# Altium PCB UF_Servo.PcbDoc (part 6 of 12)
Units mm, origin at the board's own origin, x right, y up, seen from the top; angles counter-clockwise.
Board outline 222.63 x 100.1 mm, 6 copper layers (L1, L2, L3, L4, L5, L6), stack 1.609 mm thick; 1138 components, 775 nets, 3720 pads, 1641 vias.
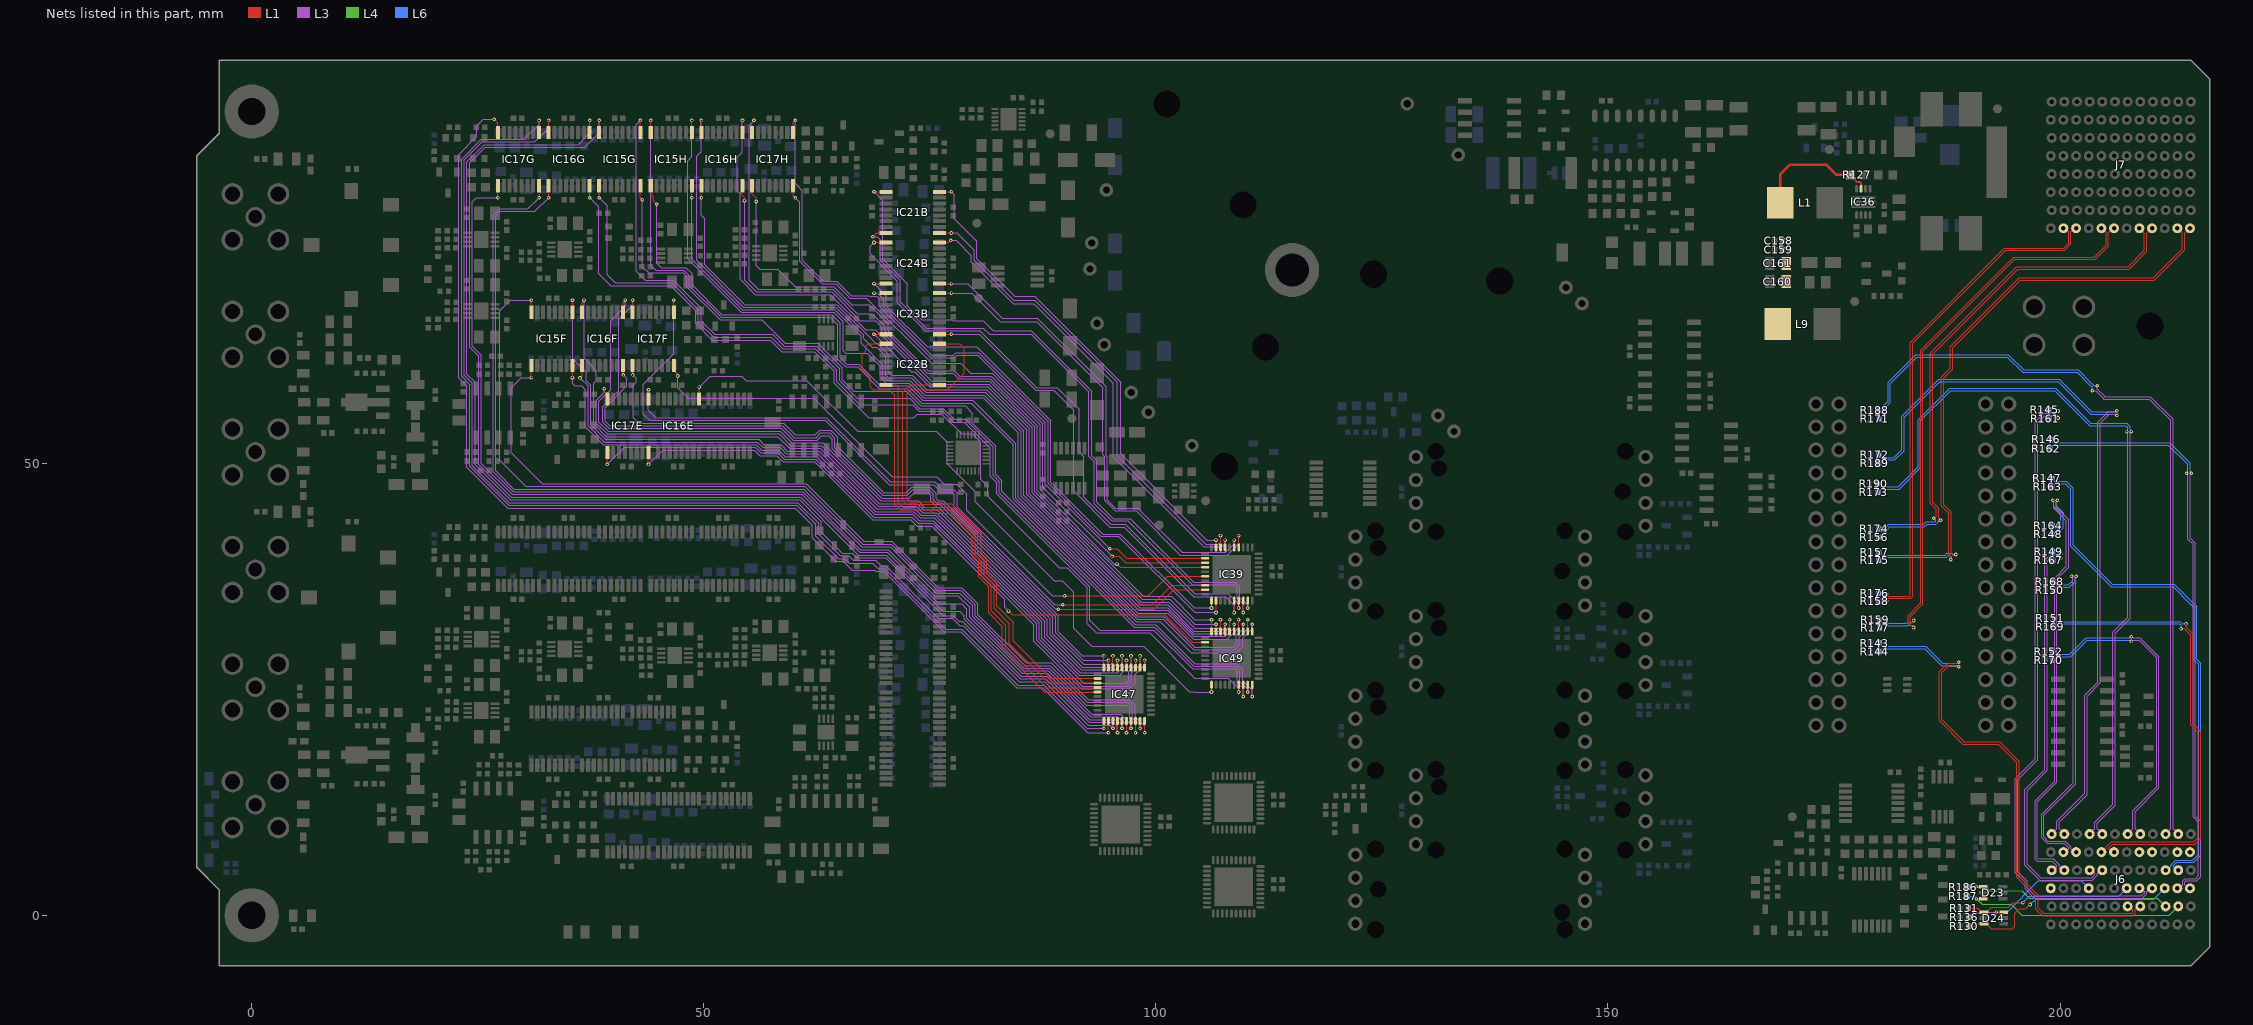
[diagram p8: the nets of this part, all layers, seen from the top]

## Part data (continued)
R22A R22B R154: library part R0402_200R_1%_0.0625W_100PPM, "Resistor - 1%", Case=0402, Manufacturer=GENERIC, Manufacturer1 ComponentHeight=0.4mm, Manufacturer1 Example="YAGEO PHYCOMP", Manufacturer1 Part Number=232270672001L, Power=0.0625W, Tolerance=±1%, Author="CERN DEM JLC", Component Type=Standard, HelpURL=\\cern.ch\dfs\Applications\Altium\Datasheets\R0402_Phycomp_RC0402.pdf, Manufacturer Part Number=R0402_200R_1%_0.0625W_100PPM, Mounted=Yes, Part Description="General Purpose Thick Film Chip Resistor", Part Number=R0402_200R_1%_0.0625W_100PPM, Pin Count=2, PressFit=No, Sense=No, SMD=Yes, Socket=No, Status="Not Recommended", TC=±100ppm/°C
  R22A R22B: CreateDate=12/3/2007, LatestRevisionDate=10/17/2012
  R154: CreateDate=03.12.2007, LatestRevisionDate=17.10.2012
R24A R24B: library part R0402_160R_1%_0.0625W_100PPM, "Resistor - 1%", Case=0402, Manufacturer=GENERIC, Manufacturer1 ComponentHeight=0.4mm, Manufacturer1 Example="YAGEO PHYCOMP", Manufacturer1 Part Number=232270671601L, Power=0.0625W, Tolerance=±1%, Author="CERN DEM JLC", Component Type=Standard, CreateDate=12/3/2007, HelpURL=\\cern.ch\dfs\Applications\Altium\Datasheets\R0402_Phycomp_RC0402.pdf, LatestRevisionDate=10/17/2012, Manufacturer Part Number=R0402_160R_1%_0.0625W_100PPM, Mounted=Yes, Part Description="General Purpose Thick Film Chip Resistor", Part Number=R0402_160R_1%_0.0625W_100PPM, Pin Count=2, PressFit=No, Sense=No, SMD=Yes, Socket=No, Status="Not Recommended", TC=±100ppm/°C
R33A R33B R40A R40B: library part R0402_68R_1%_0.0625W_100PPM, "Resistor - 1%", Case=0402, Manufacturer=GENERIC, Manufacturer1 ComponentHeight=0.4mm, Manufacturer1 Example="YAGEO PHYCOMP", Manufacturer1 Part Number=232270676809L, Power=0.0625W, Tolerance=±1%, Author="CERN DEM JLC", Component Type=Standard, CreateDate=12/3/2007, HelpURL=\\cern.ch\dfs\Applications\Altium\Datasheets\R0402_Phycomp_RC0402.pdf, LatestRevisionDate=10/17/2012, Manufacturer Part Number=R0402_68R_1%_0.0625W_100PPM, Mounted=Yes, Part Description="General Purpose Thick Film Chip Resistor", Part Number=R0402_68R_1%_0.0625W_100PPM, Pin Count=2, PressFit=No, Sense=No, SMD=Yes, Socket=No, Status="Not Recommended", TC=±100ppm/°C
R35A R35B: library part R0805_22R_1%_0.125W_100PPM, "Resistor - 1%", Case=0805, Manufacturer=GENERIC, Manufacturer1 ComponentHeight=0.6mm, Manufacturer1 Example="NIC COMPONENT", Manufacturer1 Part Number=NRC10F22R0TRF, Power=0.125W, Tolerance=±1%, Author="CERN DEM JLC", Component Type=Standard, CreateDate=12/3/2007, HelpURL=\\cern.ch\dfs\Applications\Altium\Datasheets\R0805_NIC_NRC.pdf, LatestRevisionDate=3/13/2008, Manufacturer Part Number=R0805_22R_1%_0.125W_100PPM, Mounted=Yes, Part Description="General Purpose Thick Film Chip Resistor", Part Number=R0805_22R_1%_0.125W_100PPM, Pin Count=2, PressFit=No, Sense=No, SMD=Yes, Socket=No, Status=Preferred, TC=±100ppm/°C
R36A R36B R68A R68B: library part R0402_820R_1%_0.0625W_100PPM, "Resistor - 1%", Case=0402, Manufacturer=GENERIC, Manufacturer1 ComponentHeight=0.4mm, Manufacturer1 Example="YAGEO PHYCOMP", Manufacturer1 Part Number=232270678201L, Power=0.0625W, Tolerance=±1%, Author="CERN DEM JLC", Component Type=Standard, CreateDate=12/3/2007, HelpURL=\\cern.ch\dfs\Applications\Altium\Datasheets\R0402_Phycomp_RC0402.pdf, LatestRevisionDate=10/17/2012, Manufacturer Part Number=R0402_820R_1%_0.0625W_100PPM, Mounted=Yes, Part Description="General Purpose Thick Film Chip Resistor", Part Number=R0402_820R_1%_0.0625W_100PPM, Pin Count=2, PressFit=No, Sense=No, SMD=Yes, Socket=No, Status="Not Recommended", TC=±100ppm/°C
R37 R134 R155 R160 R165 R166 R178 R180 R184 R185: library part R0603_10K_1%_0.1W_100PPM, "Resistor - 1%", Case=0603, Manufacturer=GENERIC, Manufacturer1 ComponentHeight=0.55mm, Manufacturer1 Example="NIC COMPONENT", Manufacturer1 Part Number=NRC06F1002TRF, Power=0.1W, Tolerance=±1%, Author="CERN DEM JLC", Component Type=Standard, CreateDate=03.12.2007, HelpURL=\\cern.ch\dfs\Applications\Altium\Datasheets\R0603_NIC_NRC.pdf, LatestRevisionDate=13.03.2008, Manufacturer Part Number=R0603_10K_1%_0.1W_100PPM, Mounted=Yes, Part Description="General Purpose Thick Film Chip Resistor", Part Number=R0603_10K_1%_0.1W_100PPM, Pin Count=2, PressFit=No, Sense=No, SMD=Yes, Socket=No, Status=Preferred, TC=±100ppm/°C
R47A R47B: library part R0402_130R_1%_0.0625W_100PPM, "Resistor - 1%", Case=0402, Manufacturer=GENERIC, Manufacturer1 ComponentHeight=0.4mm, Manufacturer1 Example="YAGEO PHYCOMP", Manufacturer1 Part Number=232270671301L, Power=0.0625W, Tolerance=±1%, Author="CERN DEM JLC", Component Type=Standard, CreateDate=12/3/2007, HelpURL=\\cern.ch\dfs\Applications\Altium\Datasheets\R0402_Phycomp_RC0402.pdf, LatestRevisionDate=10/17/2012, Manufacturer Part Number=R0402_130R_1%_0.0625W_100PPM, Mounted=Yes, Part Description="General Purpose Thick Film Chip Resistor", Part Number=R0402_130R_1%_0.0625W_100PPM, Pin Count=2, PressFit=No, Sense=No, SMD=Yes, Socket=No, Status="Not Recommended", TC=±100ppm/°C
R55A R55B: library part R0402_20R_1%_0.0625W_100PPM, "Resistor - 1%", Case=0402, Manufacturer=GENERIC, Manufacturer1 ComponentHeight=0.4mm, Manufacturer1 Example="YAGEO PHYCOMP", Manufacturer1 Part Number=232270672009L, Power=0.0625W, Tolerance=±1%, Author="CERN DEM JLC", Component Type=Standard, CreateDate=12/3/2007, HelpURL=\\cern.ch\dfs\Applications\Altium\Datasheets\R0402_Phycomp_RC0402.pdf, LatestRevisionDate=10/17/2012, Manufacturer Part Number=R0402_20R_1%_0.0625W_100PPM, Mounted=Yes, Part Description="General Purpose Thick Film Chip Resistor", Part Number=R0402_20R_1%_0.0625W_100PPM, Pin Count=2, PressFit=No, Sense=No, SMD=Yes, Socket=No, Status="Not Recommended", TC=±100ppm/°C
R58A R58B R75 R76 R78 R140 R191 R193 R195 R196: library part R0402_10K_1%_0.0625W_100PPM, "Resistor - 1%", Case=0402, Manufacturer=GENERIC, Manufacturer1 ComponentHeight=0.4mm, Manufacturer1 Example="YAGEO PHYCOMP", Manufacturer1 Part Number=232270671003L, Power=0.0625W, Tolerance=±1%, Author="CERN DEM JLC", Component Type=Standard, CreateDate=12/3/2007, HelpURL=\\cern.ch\dfs\Applications\Altium\Datasheets\R0402_Phycomp_RC0402.pdf, LatestRevisionDate=10/17/2012, Manufacturer Part Number=R0402_10K_1%_0.0625W_100PPM, Mounted=Yes, Part Description="General Purpose Thick Film Chip Resistor", Part Number=R0402_10K_1%_0.0625W_100PPM, Pin Count=2, PressFit=No, Sense=No, SMD=Yes, Socket=No, Status="Not Recommended", TC=±100ppm/°C
R62A R62B R62C R62D R62E R62F R62G R62H R65A R65B R102 R198 R199 R205 R206 R208A R208B R208C R208D R208E R208F R208G R208H R210A R210B: library part R0402_100K_1%_0.0625W_100PPM, "Resistor - 1%", Case=0402, Manufacturer=GENERIC, Manufacturer1 ComponentHeight=0.4mm, Manufacturer1 Example="YAGEO PHYCOMP", Manufacturer1 Part Number=232270671004L, Power=0.0625W, Tolerance=±1%, Author="CERN DEM JLC", Component Type=Standard, CreateDate=12/3/2007, HelpURL=\\cern.ch\dfs\Applications\Altium\Datasheets\R0402_Phycomp_RC0402.pdf, LatestRevisionDate=10/17/2012, Manufacturer Part Number=R0402_100K_1%_0.0625W_100PPM, Mounted=Yes, Part Description="General Purpose Thick Film Chip Resistor", Part Number=R0402_100K_1%_0.0625W_100PPM, Pin Count=2, PressFit=No, Sense=No, SMD=Yes, Socket=No, Status="Not Recommended", TC=±100ppm/°C
R70A R70B R71A R71B R73A R73B R74A R74B R83 R86 R92 R94 R108 R119 R121 R141: library part R0402_1K_1%_0.0625W_100PPM, "Resistor - 1%", Case=0402, Manufacturer=GENERIC, Manufacturer1 ComponentHeight=0.4mm, Manufacturer1 Example="YAGEO PHYCOMP", Manufacturer1 Part Number=232270671002L, Power=0.0625W, Tolerance=±1%, Author="CERN DEM JLC", Component Type=Standard, CreateDate=12/3/2007, HelpURL=\\cern.ch\dfs\Applications\Altium\Datasheets\R0402_Phycomp_RC0402.pdf, LatestRevisionDate=10/17/2012, Manufacturer Part Number=R0402_1K_1%_0.0625W_100PPM, Mounted=Yes, Part Description="General Purpose Thick Film Chip Resistor", Part Number=R0402_1K_1%_0.0625W_100PPM, Pin Count=2, PressFit=No, Sense=No, SMD=Yes, Socket=No, Status="Not Recommended", TC=±100ppm/°C
R77 R135 R137 R143 R144 R145 R146 R147 R148 R149 R150 R151 R152 R156 R157 R158 R159 R161 R162 R163 R164 R167 R168 R169 R170 R171 R172 R173 R174 R175 R176 R177 R181 R182 R186 R187 R188 R189 R190 R225A R225B R257 R260 R261 R262: library part R0402_0R_JUMPER, "Resistor", Case=0402, Manufacturer=GENERIC, Manufacturer1 ComponentHeight=0.4mm, Manufacturer1 Example="YAGEO PHYCOMP", Manufacturer1 Part Number=232270591001L, Author="CERN DEM JLC", Component Type=Standard, HelpURL=\\cern.ch\dfs\Applications\Altium\Datasheets\R0402_Phycomp_RC0402.pdf, Manufacturer Part Number=R0402_0R_JUMPER, Mounted=Yes, Part Description="1A (0.05R Max DC Resistance) Zero Ohm Jumper", Part Number=R0402_0R_JUMPER, Pin Count=2, Sense=No, SMD=Yes, Socket=No
  R77 R225A R225B: CreateDate=12/3/2007, LatestRevisionDate=10/17/2012, PressFit=No, Status="Not Recommended"
  R135 R137: CreateDate=03.12.2007, LatestRevisionDate=17.10.2012, Status="Not recommended"
  R143 R144 R145 R146 R147 R148 R149 R150 R151 R152 R156 R157 R158 R159 R161 R162 R163 R164 R167 R168 R169 R170 R171 R172 R173 R174 R175 R176 R177 R181 R182 R186 R187 R188 R189 R190 R257 R260 R261 R262: CreateDate=03.12.2007, LatestRevisionDate=17.10.2012, PressFit=No, Status="Not Recommended"
R79 R80 R87 R88 R95 R96: library part R0402_390R_1%_0.0625W_100PPM, "Resistor - 1%", Case=0402, Manufacturer=GENERIC, Manufacturer1 ComponentHeight=0.4mm, Manufacturer1 Example="YAGEO PHYCOMP", Manufacturer1 Part Number=232270673901L, Power=0.0625W, Tolerance=±1%, Author="CERN DEM JLC", Component Type=Standard, CreateDate=12/3/2007, HelpURL=\\cern.ch\dfs\Applications\Altium\Datasheets\R0402_Phycomp_RC0402.pdf, LatestRevisionDate=10/17/2012, Manufacturer Part Number=R0402_390R_1%_0.0625W_100PPM, Mounted=Yes, Part Description="General Purpose Thick Film Chip Resistor", Part Number=R0402_390R_1%_0.0625W_100PPM, Pin Count=2, PressFit=No, Sense=No, SMD=Yes, Socket=No, Status="Not Recommended", TC=±100ppm/°C
R81 R82 R89 R90 R97 R98 R222A R222B R223A R223B: library part R0402_47R_1%_0.0625W_100PPM, "Resistor - 1%", Case=0402, Manufacturer=GENERIC, Manufacturer1 ComponentHeight=0.4mm, Manufacturer1 Example="YAGEO PHYCOMP", Manufacturer1 Part Number=232270674709L, Power=0.0625W, Tolerance=±1%, Author="CERN DEM JLC", Component Type=Standard, CreateDate=12/3/2007, HelpURL=\\cern.ch\dfs\Applications\Altium\Datasheets\R0402_Phycomp_RC0402.pdf, LatestRevisionDate=10/17/2012, Manufacturer Part Number=R0402_47R_1%_0.0625W_100PPM, Mounted=Yes, Part Description="General Purpose Thick Film Chip Resistor", Part Number=R0402_47R_1%_0.0625W_100PPM, Pin Count=2, PressFit=No, Sense=No, SMD=Yes, Socket=No, Status="Not Recommended", TC=±100ppm/°C
R84 R85 R91 R93 R99 R120: library part R0402_150R_1%_0.0625W_100PPM, "Resistor - 1%", Case=0402, Manufacturer=GENERIC, Manufacturer1 ComponentHeight=0.4mm, Manufacturer1 Example="YAGEO PHYCOMP", Manufacturer1 Part Number=232270671501L, Power=0.0625W, Tolerance=±1%, Author="CERN DEM JLC", Component Type=Standard, CreateDate=12/3/2007, HelpURL=\\cern.ch\dfs\Applications\Altium\Datasheets\R0402_Phycomp_RC0402.pdf, LatestRevisionDate=10/17/2012, Manufacturer Part Number=R0402_150R_1%_0.0625W_100PPM, Mounted=Yes, Part Description="General Purpose Thick Film Chip Resistor", Part Number=R0402_150R_1%_0.0625W_100PPM, Pin Count=2, PressFit=No, Sense=No, SMD=Yes, Socket=No, Status="Not Recommended", TC=±100ppm/°C
R100 R101 R103 R104 R107 R109 R110 R111 R113 R117: library part R0603_47R_1%_0.1W_100PPM, "Resistor - 1%", Case=0603, Manufacturer=GENERIC, Manufacturer1 ComponentHeight=0.55mm, Manufacturer1 Example="NIC COMPONENT", Manufacturer1 Part Number=NRC06F47R0TRF, Power=0.1W, Tolerance=±1%, Author="CERN DEM JLC", Component Type=Standard, CreateDate=12/3/2007, HelpURL=\\cern.ch\dfs\Applications\Altium\Datasheets\R0603_NIC_NRC.pdf, LatestRevisionDate=3/13/2008, Manufacturer Part Number=R0603_47R_1%_0.1W_100PPM, Mounted=Yes, Part Description="General Purpose Thick Film Chip Resistor", Part Number=R0603_47R_1%_0.1W_100PPM, Pin Count=2, PressFit=No, Sense=No, SMD=Yes, Socket=No, Status=Preferred, TC=±100ppm/°C
R105: library part R2512_0R5_1%_1.5W_100PPM, "Resistor - 1%", Case=2512, Manufacturer=GENERIC, Manufacturer1 ComponentHeight=0.8mm, Manufacturer1 Example=WELWYN, Manufacturer1 Part Number=LR2512-R50FW, Power=1.5W, Tolerance=±1%, Author="CERN DEM JLC", Component Type=Standard, CreateDate=8/23/2010, HelpURL=\\cern.ch\dfs\Applications\Altium\Datasheets\R2512_WELWYN_LR.pdf, LatestRevisionDate=8/23/2010, Manufacturer Part Number=R2512_0R5_1%_1.5W_100PPM, Mounted=Yes, Part Description="Thick Film Chip Resistor", Part Number=R2512_0R5_1%_1.5W_100PPM, Pin Count=2, PressFit=No, Sense=No, SMD=Yes, Socket=No, Status=None, TC=±100ppm/°C
R106 R179 R183: library part R0603_2K7_1%_0.1W_100PPM, "Resistor - 1%", Case=0603, Manufacturer=GENERIC, Manufacturer1 ComponentHeight=0.55mm, Manufacturer1 Example="YAGEO PHYCOMP", Manufacturer1 Part Number=RC0603FR-072K7L, Power=0.1W, Tolerance=±1%, Author="CERN DEM JLC", Component Type=Standard, HelpURL=\\cern.ch\dfs\Applications\Altium\Datasheets\R0603_PHYCOMP_RC0603.pdf, Manufacturer Part Number=R0603_2K7_1%_0.1W_100PPM, Mounted=Yes, Part Description="General Purpose Thick Film Chip Resistor", Part Number=R0603_2K7_1%_0.1W_100PPM, Pin Count=2, PressFit=No, Sense=No, SMD=Yes, Socket=No, Status=Preferred, TC=±100ppm/°C
  R106: CreateDate=5/2/2011, LatestRevisionDate=5/2/2011
  R179 R183: CreateDate=02.05.2011, LatestRevisionDate=02.05.2011
R112: library part R0603_1M_1%_0.1W_100PPM, "Resistor - 1%", Case=0603, Manufacturer=GENERIC, Manufacturer1 ComponentHeight=0.55mm, Manufacturer1 Example="NIC COMPONENT", Manufacturer1 Part Number=NRC06F1004TRF, Power=0.1W, Tolerance=±1%, Author="CERN DEM JLC", Component Type=Standard, CreateDate=12/3/2007, HelpURL=\\cern.ch\dfs\Applications\Altium\Datasheets\R0603_NIC_NRC.pdf, LatestRevisionDate=3/13/2008, Manufacturer Part Number=R0603_1M_1%_0.1W_100PPM, Mounted=Yes, Part Description="General Purpose Thick Film Chip Resistor", Part Number=R0603_1M_1%_0.1W_100PPM, Pin Count=2, PressFit=No, Sense=No, SMD=Yes, Socket=No, Status=Preferred, TC=±100ppm/°C
R114: library part R0603_806R_0.1%_0.063W_10PPM, "Resistor - 0.1%", Case=0603, Manufacturer=GENERIC, Manufacturer1 ComponentHeight=0.5mm, Manufacturer1 Example="TYCO HOLSWORTHY", Manufacturer1 Part Number=RN73C1J806RBTDF, Power=0.063W, Tolerance=±0.1%, Author="CERN DEM JLC", Component Type=Standard, CreateDate=12/3/2007, HelpURL=\\cern.ch\dfs\Applications\Altium\Datasheets\R0603_Tyco_RN73.pdf, LatestRevisionDate=3/13/2008, Manufacturer Part Number=R0603_806R_0.1%_0.063W_10PPM, Mounted=Yes, Part Description="Thin Film Chip Resistor", Part Number=R0603_806R_0.1%_0.063W_10PPM, Pin Count=2, PressFit=No, Sense=No, SMD=Yes, Socket=No, Status="Not Recommended", TC=±10ppm
R115: library part R0603_1K6_1%_0.1W_100PPM, "Resistor - 1%", Case=0603, Manufacturer=GENERIC, Manufacturer1 ComponentHeight=0.55mm, Manufacturer1 Example="NIC COMPONENT", Manufacturer1 Part Number=NRC06F1601TRF, Power=0.1W, Tolerance=±1%, Author="CERN DEM JLC", Component Type=Standard, CreateDate=12/3/2007, HelpURL=\\cern.ch\dfs\Applications\Altium\Datasheets\R0603_NIC_NRC.pdf, LatestRevisionDate=3/13/2008, Manufacturer Part Number=R0603_1K6_1%_0.1W_100PPM, Mounted=Yes, Part Description="General Purpose Thick Film Chip Resistor", Part Number=R0603_1K6_1%_0.1W_100PPM, Pin Count=2, PressFit=No, Sense=No, SMD=Yes, Socket=No, Status=Preferred, TC=±100ppm/°C
R116 R122 R123 R124 R125 R211: library part R0402_39K_1%_0.0625W_100PPM, "Resistor - 1%", Case=0402, Manufacturer=GENERIC, Manufacturer1 ComponentHeight=0.4mm, Manufacturer1 Example="YAGEO PHYCOMP", Manufacturer1 Part Number=232270673903, Power=0.0625W, Tolerance=±1%, Author="CERN DEM JLC", Component Type=Standard, CreateDate=12/3/2007, HelpURL=\\cern.ch\dfs\Applications\Altium\Datasheets\R0402_Phycomp_RC0402.pdf, LatestRevisionDate=10/17/2012, Manufacturer Part Number=R0402_39K_1%_0.0625W_100PPM, Mounted=Yes, Part Description="General Purpose Thick Film Chip Resistor", Part Number=R0402_39K_1%_0.0625W_100PPM, Pin Count=2, PressFit=No, Sense=No, SMD=Yes, Socket=No, Status="Not Recommended", TC=±100ppm/°C
R126: library part R0603_3K09_0.1%_0.063W_10PPM, "Resistor - 0.1%", Case=0603, Manufacturer=GENERIC, Manufacturer1 ComponentHeight=0.5mm, Manufacturer1 Example="TYCO HOLSWORTHY", Manufacturer1 Part Number=RN73C1J3K09BTDF, Power=0.063W, Tolerance=±0.1%, Author="CERN DEM JLC", Component Type=Standard, CreateDate=12/3/2007, HelpURL=\\cern.ch\dfs\Applications\Altium\Datasheets\R0603_Tyco_RN73.pdf, LatestRevisionDate=3/13/2008, Manufacturer Part Number=R0603_3K09_0.1%_0.063W_10PPM, Mounted=Yes, Part Description="Thin Film Chip Resistor", Part Number=R0603_3K09_0.1%_0.063W_10PPM, Pin Count=2, PressFit=No, Sense=No, SMD=Yes, Socket=No, Status="Not Recommended", TC=±10ppm
R127: library part R0603_560K_1%_0.1W_100PPM, "Resistor - 1%", Case=0603, Manufacturer=GENERIC, Manufacturer1 ComponentHeight=0.55mm, Manufacturer1 Example="NIC COMPONENT", Manufacturer1 Part Number=NRC06F5603TRF, Power=0.1W, Tolerance=±1%, Author="CERN DEM JLC", Component Type=Standard, CreateDate=03.12.2007, HelpURL=\\cern.ch\dfs\Applications\Altium\Datasheets\R0603_NIC_NRC.pdf, LatestRevisionDate=13.03.2008, Manufacturer Part Number=R0603_560K_1%_0.1W_100PPM, Mounted=Yes, Part Description="General Purpose Thick Film Chip Resistor", Part Number=R0603_560K_1%_0.1W_100PPM, Pin Count=2, PressFit=No, Sense=No, SMD=Yes, Socket=No, Status=Preferred, TC=±100ppm/°C
R128: library part R0603_49K9_1%_0.1W_100PPM, "Resistor - 1%", Case=0603, Manufacturer=GENERIC, Manufacturer1 ComponentHeight=0.55mm, Manufacturer1 Example=VISHAY, Manufacturer1 Part Number=CRCW060349K9FKEA, Power=0.1W, Tolerance=±1%, Author="CERN DEM JLC", Component Type=Standard, CreateDate=16.11.2017, HelpURL="\\cern.ch\dfs\Applications\Altium\Datasheets\R0603_VISHAY_CRCW e3.pdf", LatestRevisionDate=16.11.2017, Manufacturer Part Number=R0603_49K9_1%_0.1W_100PPM, Mounted=Yes, Part Description="General Purpose Thick Film Chip Resistor", Part Number=R0603_49K9_1%_0.1W_100PPM, Pin Count=2, PressFit=No, Sense=No, SMD=Yes, Socket=No, Status=Preferred, TC=±100ppm/°C
R129: library part R0603_150K_1%_0.1W_100PPM, "Resistor - 1%", Case=0603, Manufacturer=GENERIC, Manufacturer1 ComponentHeight=0.55mm, Manufacturer1 Example="NIC COMPONENT", Manufacturer1 Part Number=NRC06F1503TRF, Power=0.1W, Tolerance=±1%, Author="CERN DEM JLC", Component Type=Standard, CreateDate=03.12.2007, HelpURL=\\cern.ch\dfs\Applications\Altium\Datasheets\R0603_NIC_NRC.pdf, LatestRevisionDate=13.03.2008, Manufacturer Part Number=R0603_150K_1%_0.1W_100PPM, Mounted=Yes, Part Description="General Purpose Thick Film Chip Resistor", Part Number=R0603_150K_1%_0.1W_100PPM, Pin Count=2, PressFit=No, Sense=No, SMD=Yes, Socket=No, Status=Preferred, TC=±100ppm/°C
R130 R131 R133 R136 R138 R153: library part R0402_22R_1%_0.0625W_100PPM, "Resistor - 1%", Case=0402, Manufacturer=GENERIC, Manufacturer1 ComponentHeight=0.4mm, Manufacturer1 Example="YAGEO PHYCOMP", Manufacturer1 Part Number=232270672209L, Power=0.0625W, Tolerance=±1%, Author="CERN DEM JLC", Component Type=Standard, CreateDate=03.12.2007, HelpURL=\\cern.ch\dfs\Applications\Altium\Datasheets\R0402_Phycomp_RC0402.pdf, LatestRevisionDate=17.10.2012, Manufacturer Part Number=R0402_22R_1%_0.0625W_100PPM, Mounted=Yes, Part Description="General Purpose Thick Film Chip Resistor", Part Number=R0402_22R_1%_0.0625W_100PPM, Pin Count=2, PressFit=No, Sense=No, SMD=Yes, Socket=No, Status="Not Recommended"
  R153: TC=±100ppm/°C
R132: library part R0402_1K6_1%_0.0625W_100PPM, "Resistor - 1%", Case=0402, Manufacturer=GENERIC, Manufacturer1 ComponentHeight=0.4mm, Manufacturer1 Example="YAGEO PHYCOMP", Manufacturer1 Part Number=232270671602L, Power=0.0625W, Tolerance=±1%, Author="CERN DEM JLC", Component Type=Standard, CreateDate=03.12.2007, HelpURL=\\cern.ch\dfs\Applications\Altium\Datasheets\R0402_Phycomp_RC0402.pdf, LatestRevisionDate=17.10.2012, Manufacturer Part Number=R0402_1K6_1%_0.0625W_100PPM, Mounted=Yes, Part Description="General Purpose Thick Film Chip Resistor", Part Number=R0402_1K6_1%_0.0625W_100PPM, Pin Count=2, PressFit=No, Sense=No, SMD=Yes, Socket=No, Status="Not Recommended", TC=±100ppm/°C
R139 R142 R194 R200 R204: library part R0402_499R_1%_0.1W_100PPM, "Resistor - 1%", Case=0402, Manufacturer=GENERIC, Manufacturer1 ComponentHeight=0.4mm, Manufacturer1 Example=PANASONIC, Manufacturer1 Part Number=ERJ2RKF4990X, Power=0.1W, Tolerance=±1%, Voltage=50V, Author="CERN DEM MR", Component Type=Standard, CreateDate=11/22/2016, HelpURL=\\cern.ch\dfs\Applications\Altium\Datasheets\R0402_PANASONIC_ERJ2RK.pdf, LatestRevisionDate=11/22/2016, Manufacturer Part Number=R0402_499R_1%_0.1W_100PPM, Mounted=Yes, Part Description="General Purpose Thick Film Chip Resistor", Part Number=R0402_499R_1%_0.1W_100PPM, Pin Count=2, PressFit=No, Sense=No, SMD=Yes, Socket=No, Status="Not Recommended", TC=±100ppm/°C
R192: library part R0402_2M_1%_0.0625W_100PPM, "Resistor - 1%", Case=0402, Manufacturer=GENERIC, Manufacturer1 ComponentHeight=0.4mm, Manufacturer1 Example="YAGEO PHYCOMP", Manufacturer1 Part Number=232270672005L, Power=0.0625W, Tolerance=±1%, Author="CERN DEM JLC", Component Type=Standard, CreateDate=12/3/2007, HelpURL=\\cern.ch\dfs\Applications\Altium\Datasheets\R0402_Phycomp_RC0402.pdf, LatestRevisionDate=10/17/2012, Manufacturer Part Number=R0402_2M_1%_0.0625W_100PPM, Mounted=Yes, Part Description="General Purpose Thick Film Chip Resistor", Part Number=R0402_2M_1%_0.0625W_100PPM, Pin Count=2, PressFit=No, Sense=No, SMD=Yes, Socket=No, Status="Not Recommended", TC=±100ppm/°C
R197 R202: library part R0402_33K_1%_0.0625W_100PPM, "Resistor - 1%", Case=0402, Manufacturer=GENERIC, Manufacturer1 ComponentHeight=0.4mm, Manufacturer1 Example="YAGEO PHYCOMP", Manufacturer1 Part Number=232270673303L, Power=0.0625W, Tolerance=±1%, Author="CERN DEM JLC", Component Type=Standard, CreateDate=12/3/2007, HelpURL=\\cern.ch\dfs\Applications\Altium\Datasheets\R0402_Phycomp_RC0402.pdf, LatestRevisionDate=10/17/2012, Manufacturer Part Number=R0402_33K_1%_0.0625W_100PPM, Mounted=Yes, Part Description="General Purpose Thick Film Chip Resistor", Part Number=R0402_33K_1%_0.0625W_100PPM, Pin Count=2, PressFit=No, Sense=No, SMD=Yes, Socket=No, Status="Not Recommended", TC=±100ppm/°C
R212A R212B R216A R216B R217A R217B R218A R218B R219A R219B: library part R0805_8R2_1%_0.125W_200PPM, "Resistor - 1%", Case=0805, Manufacturer=GENERIC, Manufacturer1 ComponentHeight=0.65mm, Manufacturer1 Example="YAGEO PHYCOMP", Manufacturer1 Part Number="232273468208L or RC0805FR-078R2L", Power=0.125W, Tolerance=±1%, Author="CERN DEM JLC", Component Type=Standard, CreateDate=12/3/2007, HelpURL=\\cern.ch\dfs\Applications\Altium\Datasheets\R0805_Phycomp_RC0805.pdf, LatestRevisionDate=10/17/2012, Manufacturer Part Number=R0805_8R2_1%_0.125W_200PPM, Mounted=Yes, Part Description="General Purpose Thick Film Chip Resistor", Part Number=R0805_8R2_1%_0.125W_200PPM, Pin Count=2, PressFit=No, Sense=No, SMD=Yes, Socket=No, Status=Preferred, TC=±200ppm/°C
R213A R213B: library part R0402_510R_1%_0.0625W_100PPM, "Resistor - 1%", Case=0402, Manufacturer=GENERIC, Manufacturer1 ComponentHeight=0.4mm, Manufacturer1 Example="YAGEO PHYCOMP", Manufacturer1 Part Number=232270675101L, Power=0.0625W, Tolerance=±1%, Author="CERN DEM JLC", Component Type=Standard, CreateDate=12/3/2007, HelpURL=\\cern.ch\dfs\Applications\Altium\Datasheets\R0402_Phycomp_RC0402.pdf, LatestRevisionDate=10/17/2012, Manufacturer Part Number=R0402_510R_1%_0.0625W_100PPM, Mounted=Yes, Part Description="General Purpose Thick Film Chip Resistor", Part Number=R0402_510R_1%_0.0625W_100PPM, Pin Count=2, PressFit=No, Sense=No, SMD=Yes, Socket=No, Status="Not Recommended", TC=±100ppm/°C
R220A R220B R221A R221B: library part R0805_150R_1%_0.125W_100PPM, "Resistor - 1%", Case=0805, Manufacturer=GENERIC, Manufacturer1 ComponentHeight=0.6mm, Manufacturer1 Example="NIC COMPONENT", Manufacturer1 Part Number=NRC10F1500TRF, Power=0.125W, Tolerance=±1%, Author="CERN DEM JLC", Component Type=Standard, CreateDate=12/3/2007, HelpURL=\\cern.ch\dfs\Applications\Altium\Datasheets\R0805_NIC_NRC.pdf, LatestRevisionDate=3/13/2008, Manufacturer Part Number=R0805_150R_1%_0.125W_100PPM, Mounted=Yes, Part Description="General Purpose Thick Film Chip Resistor", Part Number=R0805_150R_1%_0.125W_100PPM, Pin Count=2, PressFit=No, Sense=No, SMD=Yes, Socket=No, Status=Preferred, TC=±100ppm/°C
R224A R224B: library part R0805_27R_1%_0.125W_100PPM, "Resistor - 1%", Case=0805, Manufacturer=GENERIC, Manufacturer1 ComponentHeight=0.6mm, Manufacturer1 Example="NIC COMPONENT", Manufacturer1 Part Number=NRC10F27R0TRF, Power=0.125W, Tolerance=±1%, Author="CERN DEM JLC", Component Type=Standard, CreateDate=12/3/2007, HelpURL=\\cern.ch\dfs\Applications\Altium\Datasheets\R0805_NIC_NRC.pdf, LatestRevisionDate=3/13/2008, Manufacturer Part Number=R0805_27R_1%_0.125W_100PPM, Mounted=Yes, Part Description="General Purpose Thick Film Chip Resistor", Part Number=R0805_27R_1%_0.125W_100PPM, Pin Count=2, PressFit=No, Sense=No, SMD=Yes, Socket=No, Status=Preferred, TC=±100ppm/°C
SW1: library part JUMPSMD0805_G50, "2 SMD Pads for Bound by Solder  Drop", Manufacturer=None, Author="CERN DEM JLC", Component Type="Standard (No BOM)", ComponentHeight=0mm, CreateDate=8/26/2009, Family=Switch, HelpURL=None, LatestRevisionDate=2/12/2021, Manufacturer Part Number=None, Mounted=No, PackageDescription="2 SMD Pads for Bound by Solder Drop - Equivalent Size 0805 - Gap 0.5mm", Part Description="2 SMD Pads for Bound by Solder Drop - Equivalent Size 0805 - Gap 0.5mm", Part Number=JUMPSMD0805_G50, Pin Count=2, PressFit=No, Sense=No, SMD=No, Socket=No, Status=None
T1 T2 T19 T20: "N-CHANNEL MOSFET WITH DIODE", Case=SOT23-3, Manufacturer="ON SEMICONDUCTOR", Manufacturer Part Number=BSS138L, Author="CERN DEM JLC", Bonding=No, Component Type=Standard, ComponentHeight=1.11mm, CreateDate=23.03.2009, Device=BSS138LT1G, HelpURL=\\cern.ch\dfs\Applications\Altium\Datasheets\BSS138LT1G.pdf, LatestRevisionDate=25.05.2022, Mounted=Yes, PackageDescription="SOT23, 0.95mm Pitch; 3 Pin, 1.40mm W X 3.00mm L X 1.10mm H body, IPC Medium Density", Part Description="50V, 200mA N-Channel Enhancement Mode Field-Effect Transistor", Part Number=BSS138LT1G, Pin Count=3, PressFit=No, Sense=No, SMD=Yes, Socket=No
T3 T4 T12 T13 T14 T15 T16 T17 T18: "N-CHANNEL MOSFET WITH DIODE", Case=SOT23-3, Manufacturer="ON SEMICONDUCTOR", Author="CERN DEM JLC", Bonding=No, Component Type=Standard, ComponentHeight=1.11mm, CreateDate=23.03.2009, Device=BSS138LT1G, HelpURL=\\cern.ch\dfs\Applications\Altium\Datasheets\BSS138LT1G.pdf, LatestRevisionDate=23.03.2009, Manufacturer Part Number=BSS138LT1G, Mounted=Yes, PackageDescription="SOT23 3-Leads, Pitch 0.95mm - Body 1.4x3mm, IPC Medium Density", Part Description="50V 200mA N-Channel Enhancement Mode Field-Effect Transistor", Part Number=BSS138LT1G, Pin Count=3, PressFit=No, Sense=No, SMD=Yes, Socket=No
T7: "20V DUAL N-Channel 2.5V Specified PowerTrench MOSFET", Case=SOIC8, Manufacturer="FAIRCHILD SEMICONDUCTOR", Author="CERN DEM BC", Bonding=No, Component Type=Standard, ComponentHeight=1.75mm, CreateDate=9/2/2015, Device=FDS9926A, HelpURL=\\cern.ch\dfs\Applications\Altium\Datasheets\FDS9926A.pdf, LatestRevisionDate=9/2/2015, Manufacturer Part Number=FDS9926A, Mounted=Yes, PackageDescription="SOIC 8, Pitch 1.27mm - Body 4x5mm, IPC Medium Density", Part Description="20V, Dual N-Channel 2.5V Specified PowerTrench® MOSFET", Part Number=FDS9926A, Pin Count=8, PressFit=No, Sense=No, SMD=Yes, Socket=No
T21: library part Si4425DDY-T1-GE3, "-30V -19.7A P-Channel MOSFET", Case=SOIC8, Manufacturer="VISHAY SILICONIX", Author="CERN DEM MR", Bonding=No, Component Type=Standard, ComponentHeight=1.75mm, CreateDate=10/5/2016, Device=SI4425DDY-T1-GE3, HelpURL=\\cern.ch\dfs\Applications\Altium\Datasheets\SI4425DDY-T1-GE3.pdf, LatestRevisionDate=10/5/2016, Manufacturer Part Number=SI4425DDY-T1-GE3, Mounted=Yes, PackageDescription="SOIC 8, Pitch 1.27mm - Body 4x5mm, IPC Medium Density", Part Description="-30V -19.7A P-Channel MOSFET", Part Number=Si4425DDY-T1-GE3, Pin Count=8, PressFit=No, Sense=No, SMD=Yes, Socket=No
T22: "NPN Transistor", Case=SOT23-3, Manufacturer="NXP SEMICONDUCTORS", Author="CERN DEM JLC", Bonding=No, Component Type=Standard, ComponentHeight=1.1mm, CreateDate=14.06.2011, Device=BC847B, HelpURL=\\cern.ch\dfs\Applications\Altium\Datasheets\BC847B.pdf, LatestRevisionDate=14.06.2011, Manufacturer Part Number=BC847B, Mounted=Yes, PackageDescription="SOT23, 3 pin, Pitch 0.95mm - 1.3mm W X 2.9mm L X 1.1mm H, IPC Medium Density", Part Description="45V 100mA NPN general-purpose transistors", Part Number=BC847B, Pin Count=3, PressFit=No, Sense=No, SMD=Yes, Socket=No
Tr1: library part CORE_RTNC-40X25X15(M-083), "Toroidal Core with 5 Windings", Current=N/A, Manufacturer=Feryster, Author="Michal Beldyga", Component Type=Standard, ComponentHeight=15mm, CreateDate=2/14/2025, DC Resistance=N/A, LatestRevisionDate=2/14/2025, Manufacturer Part Number=RTNC-40X25X15(M-083), Part Description="40x25x15mm AL=99000 Nanoperm Core", Part Number=CORE_RTNC-40X25X15(M-083), Pin Count=10, SMD=No, Status=Active, Tolerance=N/A

## Via types
v1: diameter 0.4, hole 0.2, L1 to L6, tented both sides, 1545 vias
v2: diameter 0.4, hole 0.2, L1 to L6, 84 vias
v3: diameter 0.5, hole 0.25, L1 to L6, tented both sides, 12 vias

## Nets (pads, with @x,y where several pads share a name; then routed paths per layer and width w, separated by ;. In a path a pad name is that pad's centre, name@x,y a point inside that pad or via, vN(x,y) a via of type N, cw(c..) or ccw(c..) an arc to the next point about the centre after c; other vN are vias at no path point)
3V3: C158.2 C159.2 C160.2 C161.2 IC36.6 L1.2 L9.1 R127.2 | length 14
  L1 w0.2: R127.2@176.794,81.906 177.144,81.556 177.194,81.556 177.594,81.156 177.876,81.156 177.994,81.038 IC36.6@177.994,80.406
  L1 w0.3: L1.2@169.069,78.856 169.069,82.031 170.094,83.056 174.194,83.056 175.294,81.956 R127.2@176.794,81.956
BGA0: D24.3 J6.C3 R130.2 | length 24.7
  L1 w0.125: R130.2@189.864,-1.144 190.494,-1.144 190.744,-0.894 D24.3@191.594,-0.894 191.869,-0.894 192.006,-1.032 192.006,-1.057 192.394,-1.444 194.694,-1.444 194.994,-1.144 194.994,0.256 195.494,0.756 196.194,0.756 v1(196.694,1.256)
  L6 w0.125: v1(196.694,1.256) 197.294,1.856 210.388,1.856 J6.C3@211.577,3.044
BGA1: D24.1 J6.F3 R131.2 | length 18.8
  L1 w0.125: R131.2@189.864,0.856 190.894,0.856 191.181,0.568 191.181,0.543 191.319,0.406 D24.1@191.594,0.406 191.869,0.406 192.006,0.543 192.006,0.568 192.394,0.956 194.294,0.956 194.794,1.456 v1(195.894,1.456)
  L6 w0.125: v1(195.894,1.456) 196.594,2.156 206.488,2.156 J6.F3@207.377,3.044
BGA2: D24.6 J6.I3 R136.2 | length 16.2
  L1 w0.125: R136.2@189.864,-0.144 189.864,-0.124 190.091,0.103 190.111,0.103 190.364,0.356 v1(190.594,0.356) ; v1(192.944,0.406) D24.6@193.794,0.406
  L3 w0.125: v1(190.594,0.356) 191.394,0.356 191.444,0.406 v1(192.944,0.406)
  L6 w0.125: v1(192.944,0.406) 194.144,0.406 197.594,3.856 202.365,3.856 J6.I3@203.177,3.044
BGA3: J6.L3
BP_I2C.SCL: D23.3 J6.B2 R187.1 | length 25.4
  L1 w0.125: v1(190.744,1.906) D23.3@191.594,1.906
  L4 w0.125: v1(190.744,1.906) 191.394,1.256 194.594,1.256 195.794,0.056 212.088,0.056 J6.B2@213.077,1.044
  L6 w0.125: R187.1@189.764,2.156 190.494,2.156 v1(190.744,1.906)
BP_I2C.SDA: D23.1 J6.C2 R186.1 | length 23.7
  L1 w0.125: v1(190.744,3.206) D23.1@191.594,3.206
  L4 w0.125: v1(190.744,3.206) 191.844,3.206 192.294,2.756 195.794,2.756 196.594,1.956 210.765,1.956 J6.C2@211.677,1.044
  L6 w0.125: R186.1@189.764,3.156 190.194,3.156 190.244,3.206 v1(190.744,3.206)
BP_IO.LVDS_N0: J6.E3 R161.1 | length 71.2
  L3 w0.13: v1(199.779,55.059) 199.516,55.322 198.296,55.322 197.513,54.539 197.513,17.245 195.308,15.04 195.308,4.884 196.383,3.809 196.383,3.076 197.26,2.198 208.985,2.198 209.352,2.566 209.352,2.673 208.982,3.044 J6.E3@208.777,3.044
  L6 w0.125: R161.1@198.826,54.983 199.054,55.211 199.054,55.269 199.127,55.342 199.673,55.342 199.779,55.237 v1(199.779,55.059)
BP_IO.LVDS_N1: J6.B3 R162.1 | length 65.5
  L3 w0.13: J6.B3@212.977,3.044 213.182,3.044 213.552,3.414 213.552,3.625 213.552,3.859 213.798,4.105 214.994,4.105 215.294,4.405 215.294,10.356 214.721,10.929 214.721,41.076 214.145,41.652 214.145,48.757 214.019,48.883 v1(214.019,48.956)
  L6 w0.125: R162.1@198.953,51.681 199.181,51.909 199.181,51.979 199.254,52.052 211.997,52.052 214.132,49.917 214.132,49.143 214.019,49.03 v1(214.019,48.956)
BP_IO.LVDS_N2: J6.C4 R163.1 | length 57.2
  L6 w0.125: R163.1@199.106,47.439 199.333,47.667 199.333,47.704 199.406,47.778 199.811,47.778 199.816,47.772 200.594,47.772 201.194,47.172 201.194,40.868 205.68,36.382 212.514,36.382 214.42,34.476 214.437,34.476 ; J6.C4@211.677,5.044 211.887,5.044 212.252,5.408 212.252,5.615 212.793,6.156 214.684,6.156 215.322,6.794 215.322,27.831 214.866,28.287 214.866,34.064 214.445,34.484
BP_IO.LVDS_N3: J6.L4 R164.1 | length 49.7
  L3 w0.13: J6.L4@199.077,5.044 199.282,5.044 199.652,5.414 199.652,5.522 199.136,6.038 197.486,6.038 197.243,6.28 197.243,12.73 199.413,14.899 199.413,37.36 200.694,38.641 200.694,43.703 199.332,45.065 199.332,45.757 199.207,45.883 v1(199.207,45.956)
  L6 w0.125: R164.1@199.156,43.127 199.384,42.899 199.384,42.877 199.457,42.804 199.842,42.804 200.094,43.056 200.094,44.456 199.32,45.23 199.32,45.856 199.22,45.956 v1(199.207,45.956)
BP_IO.LVDS_N4: J6.I4 R167.1 | length 46.4
  L3 w0.13: v1(200.094,39.53) 200.094,39.556 199.994,39.656 198.994,39.656 198.58,39.242 198.58,16.076 196.349,13.846 196.349,5.694 197.845,4.198 203.485,4.198 203.852,4.566 203.852,4.673 203.482,5.044 J6.I4@203.277,5.044
  L6 w0.125: R167.1@199.207,39.311 199.435,39.539 199.435,39.571 199.508,39.644 199.905,39.644 200.019,39.53 v1(200.094,39.53)
BP_IO.LVDS_N5: J6.K5 R168.1 | length 37.7
  L3 w0.13: J6.K5@200.377,7.044 200.582,7.044 200.952,7.414 200.952,7.522 200.467,8.007 198.565,8.007 197.955,8.618 197.955,11.206 201.473,14.724 201.473,36.701 201.409,36.765 201.409,37.349 201.28,37.478 v1(201.28,37.551)
  L6 w0.125: R168.1@199.334,36.924 199.562,36.696 199.562,36.664 199.635,36.591 200.929,36.591 201.394,37.056 201.394,37.456 201.298,37.551 v1(201.28,37.551)
BP_IO.LVDS_N6: J6.H5 R169.1 | length 50.2
  L1 w0.125: J6.H5@204.577,7.044 204.763,7.044 205.14,7.42 205.14,7.637 205.706,8.204 214.815,8.204 215.31,8.699 215.31,20.253 214.454,21.109 214.454,31.036 214.035,31.454 213.747,31.742 v1(213.393,31.742)
  L6 w0.125: R169.1@199.385,31.965 199.612,32.193 199.612,32.222 199.686,32.295 213.211,32.295 213.393,32.113 v1(213.393,31.742)
BP_IO.LVDS_N7: J6.F6 R170.1 | length 34.3
  L3 w0.13: J6.F6@207.477,9.044 208.052,9.619 208.052,11.614 208.198,11.76 210.694,14.256 210.694,28.556 208.768,30.481 208.092,30.481 207.967,30.356 v1(207.894,30.356)
  L6 w0.125: R170.1@199.207,28.288 199.435,28.515 199.435,28.56 199.508,28.633 ; R170.1@199.428,28.553 199.508,28.633 ; v1(207.894,30.356) 207.819,30.356 207.706,30.469 203.007,30.469 201.171,28.633 199.508,28.633
BP_IO.LVDS_N8: J6.C6 R171.1 | length 85.9
  L3 w0.13: v1(203.563,58.082) 203.935,58.082 204.709,57.308 204.862,57.156 209.894,57.156 212.252,54.797 212.252,9.619 J6.C6@211.677,9.044
  L6 w0.125: R171.1@179.979,54.983 180.207,55.211 180.207,55.243 180.28,55.316 180.545,55.316 180.856,55.627 180.856,56.386 181.249,56.779 181.249,58.875 184.178,61.803 194.178,61.803 195.886,60.095 201.904,60.095 203.133,58.867 203.563,58.436 v1(203.563,58.082)
BP_IO.LVDS_N9: J6.L6 R172.1 | length 84.1
  L3 w0.13: J6.L6@199.077,9.044 199.64,9.607 199.64,10.444 202.738,13.542 202.738,24.4 204.194,25.856 204.194,54.608 205.316,55.73 206.095,55.73 206.221,55.856 v1(206.294,55.856)
  L6 w0.125: R172.1@179.954,51.021 180.181,50.793 180.181,50.761 180.255,50.688 181.626,50.688 182.494,51.556 182.494,55.256 186.568,59.33 199.907,59.33 203.494,55.743 206.106,55.743 206.219,55.856 v1(206.294,55.856)
BP_IO.LVDS_N10: J6.I6 R173.1 | length 83.8
  L3 w0.13: J6.I6@203.277,9.044 203.852,9.619 203.852,10.359 205.845,12.351 205.845,31.359 207.494,33.008 207.494,53.456 207.394,53.556 v1(207.368,53.556)
  L6 w0.125: R173.1@179.852,46.855 180.08,47.083 180.08,47.108 180.153,47.181 182.206,47.181 184.568,49.542 184.568,54.73 187.894,58.056 199.406,58.056 203.28,54.182 207.28,54.182 207.481,53.981 207.481,53.743 207.368,53.63 v1(207.368,53.556)
BP_IO.LVDS_N11: J7.E1 R174.1 | length 57.2
  L1 w0.125: v1(186.029,43.972) 186.104,43.972 186.212,44.08 186.219,44.08 186.292,44.153 186.292,44.963 185.649,45.607 185.649,62.228 195.231,71.81 207.531,71.81 209.332,73.611 209.332,74.948 209.34,74.956 209.34,75.481 J7.E1@208.777,76.044
  L6 w0.125: R174.1@179.941,42.817 180.169,42.589 180.169,42.557 180.242,42.484 180.438,42.484 180.544,42.589 180.544,42.781 181.046,43.283 184.884,43.283 185.181,43.58 186.16,43.58 186.237,43.657 186.237,43.761 186.029,43.969 v1(186.029,43.972)
BP_IO.LVDS_N12: J7.B1 R175.1 | length 65.6
  L1 w0.125: v1(187.917,39.413) 187.917,39.767 187.718,39.966 187.718,44.515 186.868,45.365 186.868,59.572 187.856,60.561 187.856,62.949 195.474,70.566 210.325,70.566 213.532,73.772 213.532,74.948 213.54,74.956 213.54,75.481 J7.B1@212.977,76.044
  L6 w0.125: R175.1@179.954,39.311 179.954,39.331 180.254,39.632 187.411,39.632 187.58,39.801 187.884,39.801 187.957,39.727 187.957,39.453 v1(187.917,39.413)
BP_IO.LVDS_N13: J7.K1 R176.1 | length 56.1
  L1 w0.125: v1(180.83,35.628) 180.83,35.439 180.903,35.366 183.373,35.366 183.446,35.439 183.446,63.409 183.593,63.555 193.747,73.709 193.894,73.856 200.394,73.856 200.952,74.414 200.952,75.472 200.952,75.679 200.587,76.044 J7.K1@200.377,76.044
  L6 w0.125: R176.1@180.005,35.628 R176.1@179.954,35.679 179.954,35.659 180.254,35.359 180.561,35.359 v1(180.83,35.628)
BP_IO.LVDS_N14: J7.H1 R177.1 | length 63.3
  L1 w0.125: v1(183.802,31.882) 183.802,32.071 183.729,32.144 183.448,32.144 183.189,32.403 183.189,33.207 184.594,34.612 184.594,62.556 184.74,62.702 194.747,72.709 194.894,72.856 203.794,72.856 205.094,74.156 205.094,75.621 204.736,75.979 204.736,76.044 J7.H1@204.577,76.044
  L6 w0.125: R177.1@179.979,31.864 R177.1@180.022,31.864 ; R177.1@180.034,31.856 180.034,31.876 180.327,32.169 180.766,32.169 180.87,32.065 183.056,32.065 183.123,32.132 183.551,32.132 v1(183.802,31.882)
BP_IO.LVDS_N15: J6.F2 R144.2 | length 56.6
  L1 w0.125: v1(188.794,27.543) 188.719,27.543 188.606,27.656 187.694,27.656 186.894,26.856 186.894,21.716 189.38,19.23 193.307,19.23 195.494,17.043 195.494,4.356 197.594,2.256 197.594,0.856 198.194,0.256 207.94,0.256 208.04,0.356 208.04,0.45 208.04,0.667 207.663,1.044 J6.F2@207.477,1.044
  L6 w0.125: R144.2@180.005,29.202 180.232,29.43 180.232,29.477 180.306,29.55 185.011,29.55 186.906,27.656 188.606,27.656 188.719,27.543 v1(188.794,27.543)
BP_IO.LVDS_P0: J6.D3 R145.1 | length 72.4
  L3 w0.13: v1(199.779,55.834) 199.516,55.571 198.193,55.571 197.264,54.642 197.264,17.348 195.059,15.143 195.059,4.781 196.134,3.706 196.134,2.973 197.157,1.949 209.088,1.949 209.601,2.463 209.601,2.673 209.972,3.044 J6.D3@210.177,3.044
  L6 w0.125: R145.1@198.763,55.948 198.99,55.721 198.99,55.689 199.064,55.616 199.705,55.616 199.779,55.689 v1(199.779,55.834)
BP_IO.LVDS_P1: J6.A3 R146.1 | length 65.9
  L3 w0.13: J6.A3@214.377,3.044 214.172,3.044 213.801,3.414 213.801,3.522 213.801,3.756 213.901,3.856 215.097,3.856 215.543,4.301 215.543,10.459 214.97,11.032 214.97,41.18 214.394,41.756 214.394,48.757 214.519,48.883 v1(214.519,48.956)
  L6 w0.125: R146.1@198.953,52.697 199.181,52.47 199.181,52.399 199.254,52.326 212.11,52.326 214.406,50.031 214.406,49.143 214.519,49.03 v1(214.519,48.956)
BP_IO.LVDS_P2: J6.B4 R147.1 | length 57.7
  L6 w0.125: R147.1@199.08,48.379 199.308,48.152 199.308,48.125 199.381,48.052 199.925,48.052 199.93,48.046 200.707,48.046 201.468,47.286 201.468,40.982 205.794,36.656 212.628,36.656 215.116,34.168 215.116,28.391 215.572,27.935 215.572,6.69 214.788,5.906 212.896,5.906 212.502,5.512 212.502,5.408 212.866,5.044 J6.B4@213.077,5.044
BP_IO.LVDS_P3: J6.K4 R148.1 | length 50.2
  L3 w0.13: v1(199.707,45.956) 199.707,45.883 199.581,45.757 199.581,45.168 200.194,44.556 200.28,44.469 200.943,43.807 200.943,38.538 199.662,37.257 199.662,14.796 197.492,12.627 197.492,6.383 197.589,6.287 199.24,6.287 199.901,5.625 199.901,5.414 200.272,5.044 J6.K4@200.477,5.044
  L6 w0.125: R148.1@199.156,42.207 199.384,42.435 199.384,42.457 199.457,42.53 199.955,42.53 200.368,42.942 200.368,44.569 199.594,45.343 199.594,45.856 199.694,45.956 v1(199.707,45.956)
BP_IO.LVDS_P4: J6.H4 R149.1 | length 47.7
  L3 w0.13: v1(200.094,40.03) 200.094,40.005 199.994,39.905 198.89,39.905 198.331,39.345 198.331,16.179 196.1,13.949 196.1,5.591 197.742,3.949 203.588,3.949 204.101,4.463 204.101,4.673 204.472,5.044 J6.H4@204.677,5.044
  L6 w0.125: R149.1@199.207,40.251 199.435,40.024 199.435,39.992 199.508,39.918 199.907,39.918 200.019,40.03 v1(200.094,40.03)
BP_IO.LVDS_P5: J6.J5 R150.1 | length 38.2
  L3 w0.13: J6.J5@201.777,7.044 201.572,7.044 201.201,7.414 201.201,7.625 200.57,8.256 198.669,8.256 198.204,8.721 198.204,11.103 201.722,14.621 201.722,36.804 201.658,36.868 201.658,37.36 201.781,37.483 v1(201.781,37.556)
  L6 w0.125: R150.1@199.334,35.984 199.562,36.212 199.562,36.244 199.635,36.317 201.042,36.317 201.668,36.942 201.668,37.456 201.768,37.556 v1(201.781,37.556)
BP_IO.LVDS_P6: J6.G5 R151.1 | length 50.6
  L1 w0.125: J6.G5@205.977,7.044 205.79,7.044 205.414,7.42 205.414,7.524 205.82,7.93 214.928,7.93 215.584,8.585 215.584,20.366 214.727,21.222 214.727,31.149 214.149,31.728 213.941,31.936 v1(213.941,32.29)
  L6 w0.125: R151.1@199.385,32.885 199.612,32.658 199.612,32.619 199.686,32.545 213.315,32.545 213.57,32.29 v1(213.941,32.29)
BP_IO.LVDS_P7: J6.E6 R152.1 | length 34.5
  L3 w0.13: v1(207.894,30.856) 207.967,30.856 208.092,30.73 208.871,30.73 209.097,30.505 209.27,30.332 210.943,28.659 210.943,14.152 208.301,11.511 208.301,9.619 J6.E6@208.877,9.044
  L6 w0.125: R152.1@199.207,29.228 199.207,29.208 199.435,28.98 199.455,28.98 199.528,28.907 201.057,28.907 202.893,30.743 207.706,30.743 207.819,30.856 v1(207.894,30.856)
BP_IO.LVDS_P8: J6.B6 R188.1 | length 86.3
  L3 w0.13: v1(204.111,58.63) 204.111,58.258 204.812,57.557 204.965,57.405 209.997,57.405 212.501,54.9 212.501,9.619 J6.B6@213.077,9.044
  L6 w0.125: R188.1@179.979,55.923 180.207,55.696 180.207,55.663 180.28,55.59 180.432,55.59 180.582,55.74 180.582,56.5 180.975,56.893 180.975,58.988 184.064,62.077 194.292,62.077 196,60.369 202.018,60.369 203.406,58.98 203.757,58.63 v1(204.111,58.63)
BP_IO.LVDS_P9: J6.K6 R189.1 | length 83.7
  L3 w0.13: J6.K6@200.477,9.044 199.914,9.607 199.914,10.331 202.987,13.404 202.987,24.296 204.443,25.752 204.443,54.505 205.419,55.481 206.095,55.481 206.221,55.356 v1(206.294,55.356)
  L6 w0.125: R189.1@179.954,50.081 180.181,50.309 180.181,50.341 180.255,50.414 181.739,50.414 182.768,51.442 182.768,55.142 186.681,59.056 199.794,59.056 203.381,55.469 206.106,55.469 206.219,55.356 v1(206.294,55.356)
BP_IO.LVDS_P10: J6.H6 R190.1 | length 84.3
  L3 w0.13: J6.H6@204.677,9.044 204.101,9.619 204.101,10.256 206.094,12.248 206.094,31.256 207.743,32.905 207.743,53.456 207.843,53.556 v1(207.868,53.556)
  L6 w0.125: R190.1@179.84,47.775 179.84,47.755 180.14,47.455 182.093,47.455 184.294,49.656 184.294,54.843 187.78,58.33 199.52,58.33 203.394,54.456 207.394,54.456 207.755,54.094 207.755,53.743 207.868,53.63 v1(207.868,53.556)
BP_IO.LVDS_P11: J7.D1 R156.1 | length 57.7
  L1 w0.125: v1(186.774,43.757) 186.774,43.76 186.566,43.968 186.566,45.077 185.923,45.72 185.923,62.114 195.345,71.536 207.645,71.536 209.606,73.497 209.606,74.834 209.614,74.842 209.614,75.481 J7.D1@210.177,76.044
  L6 w0.125: R156.1@179.941,41.877 180.169,42.104 180.169,42.137 180.242,42.21 180.552,42.21 180.818,42.476 180.818,42.667 181.159,43.009 184.998,43.009 185.295,43.306 186.273,43.306 186.511,43.544 186.511,43.575 186.584,43.649 186.591,43.649 186.699,43.757 v1(186.774,43.757)
BP_IO.LVDS_P12: J7.A1 R157.1 | length 65.6
  L1 w0.125: v1(188.465,39.961) 188.11,39.961 187.992,40.08 187.992,44.628 187.142,45.478 187.142,59.459 188.13,60.448 188.13,62.835 195.587,70.292 210.438,70.292 213.806,73.659 213.806,74.834 213.814,74.842 213.814,75.481 J7.A1@214.377,76.044
  L6 w0.125: R157.1@179.954,40.226 179.954,40.206 180.254,39.906 187.297,39.906 187.466,40.074 187.997,40.074 188.151,39.921 188.425,39.921 v1(188.465,39.961)
BP_IO.LVDS_P13: J7.J1 R158.1 | length 56.4
  L1 w0.125: v1(180.83,34.853) 180.83,35.043 180.903,35.116 183.477,35.116 183.697,35.336 183.697,63.305 193.997,73.606 200.497,73.606 201.202,74.31 201.202,75.576 201.202,75.679 201.566,76.044 J7.J1@201.777,76.044
  L6 w0.125: R158.1@179.954,34.765 179.954,34.785 180.254,35.085 180.619,35.085 180.83,34.874 v1(180.83,34.853)
BP_IO.LVDS_P14: J7.G1 R159.1 | length 62.9
  L1 w0.125: v1(183.802,32.657) 183.802,32.467 183.729,32.394 183.552,32.394 183.439,32.506 183.439,33.104 184.844,34.508 184.844,62.452 194.997,72.606 203.897,72.606 205.344,74.052 205.344,75.57 205.817,76.044 J7.G1@205.977,76.044
  L6 w0.125: R159.1@179.979,32.738 R159.1@180.031,32.738 ; R159.1@180.034,32.756 180.034,32.736 180.327,32.443 180.88,32.443 180.983,32.339 182.942,32.339 183.009,32.406 183.551,32.406 v1(183.802,32.657)
BP_IO.LVDS_P15: J6.E2 R143.2 | length 57.9
  L1 w0.125: v1(188.794,28.043) 188.719,28.043 188.606,27.93 187.58,27.93 186.62,26.969 186.62,21.602 189.266,18.956 193.194,18.956 195.22,16.93 195.22,4.242 197.32,2.142 197.32,0.742 198.08,-0.018 208.053,-0.018 208.314,0.242 208.314,0.564 208.314,0.667 208.69,1.044 J6.E2@208.877,1.044
  L6 w0.125: R143.2@179.992,30.167 180.22,29.94 180.22,29.898 180.293,29.824 185.125,29.824 187.02,27.93 188.606,27.93 188.719,28.043 v1(188.794,28.043)
BP_MGT_Rx_N: J6.E5
BP_MGT_Rx_P: J6.D5
BP_MGT_Tx_N: J6.B5
BP_MGT_Tx_P: J6.A5
CAP0.CAP_SEL0.SEL0: IC15G.1 IC49.29 | length 110.9
  L1 w0.1: IC15G.1@42.975,86.65 v1(42.975,87.975) ; v1(110.15,24.75) IC49.29@110.15,25.55
  L3 w0.1: v1(42.975,87.975) 42.5,87.5 42.5,71.3 43.5,70.3 46.6,70.3 49.719,67.181 49.719,65.781 51.2,64.3 57.6,64.3 58.9,63 62.5,63 65.019,60.481 65.019,59.181 66.95,57.25 72.75,57.25 73.9,56.1 76.5,56.1 77.7,54.9 78.9,54.9 81.983,51.817 81.983,48.717 82.683,48.017 82.683,46.817 97.612,31.888 99.888,31.888 104.176,27.6 108.8,27.6 109.3,27.1 109.3,25.9 110.15,25.05 v1(110.15,24.75)
CAP0.CAP_SEL0.SEL1: IC15G.16 IC49.30 | length 103.2
  L1 w0.1: IC15G.16@42.975,80.75 42.975,79.425 v1(43.2,79.2) ; v1(110.65,24.25) IC49.30@110.65,25.55
  L3 w0.1: v1(43.2,79.2) 43.2,71.8 43.9,71.1 47.7,71.1 48.1,70.7 48.1,69.6 51.8,65.9 56.4,65.9 59,63.3 62.6,63.3 65.3,60.6 65.3,59.3 66.6,58 72.4,58 74,56.4 78.9,56.4 79.7,55.6 79.7,54.5 82.266,51.934 82.266,48.834 82.966,48.134 82.966,46.934 97.7,32.2 100,32.2 104.3,27.9 108.9,27.9 109.6,27.2 109.6,26 110.65,24.95 v1(110.65,24.25)
CAP0.CAP_SEL0.SEL2: IC15G.9 IC49.28 | length 108.7
  L1 w0.1: v1(38.425,79.425) IC15G.9@38.425,80.75 ; v1(109.65,24.25) IC49.28@109.65,25.55
  L3 w0.1: v1(38.425,79.425) 39.3,78.55 39.3,70.9 40.2,70 46.449,70 49.4,67.049 49.4,65.649 51.068,63.981 57.468,63.981 58.749,62.7 62.349,62.7 64.7,60.349 64.7,59.049 67.249,56.5 73.1,56.5 73.8,55.8 76.4,55.8 77.6,54.6 78.8,54.6 81.7,51.7 81.7,48.6 82.4,47.9 82.4,46.7 92.7,36.4 92.7,32.7 93.8,31.6 99.751,31.6 104.051,27.3 108.7,27.3 109,27 109,25.8 109.65,25.15 v1(109.65,24.25)
CAP0.CAP_SEL0.SEL3: IC15G.8 IC47.25 | length 136.6
  L1 w0.1: IC15G.8@38.425,86.65 v1(38.425,87.975) ; v1(96.25,20.75) IC47.25@96.25,21.55
  L3 w0.1: v1(38.425,87.975) 38.425,86.625 36.8,85 25.8,85 24.1,83.3 24.1,62.876 25.1,61.876 25.1,49.9 28.7,46.3 60.7,46.3 65.5,41.5 67.1,39.9 70.2,39.9 76.4,33.7 78.3,33.7 78.8,33.2 78.8,32.8 85.1,26.5 87.9,26.5 92.7,21.7 95.6,21.7 96.25,21.05 v1(96.25,20.75)
CAP0.CAP_SEL1.SEL0: IC16G.1 IC47.24 | length 137.2
  L1 w0.1: IC16G.1@37.375,86.65 v1(37.375,87.975) ; v1(95.75,20.25) IC47.24@95.75,21.55
  L3 w0.1: v1(37.375,87.975) 37.375,86.575 36.1,85.3 25.7,85.3 23.8,83.4 23.8,59.9 24.7,59 24.7,49.9 28.6,46 60.6,46 63,43.6 63,42.4 65.3,40.1 66.4,40.1 66.9,39.6 70.1,39.6 76.5,33.2 77.6,33.2 78.2,32.6 78.6,32.6 85,26.2 87.8,26.2 92.6,21.4 95.3,21.4 95.75,20.95 v1(95.75,20.25)
CAP0.CAP_SEL1.SEL1: IC16G.16 IC49.27 | length 108.4
  L1 w0.1: v1(37.375,79.425) IC16G.16@37.375,80.75 ; v1(109.15,24.75) IC49.27@109.15,25.55
  L3 w0.1: v1(37.375,79.425) 38.4,78.4 38.4,71 39.7,69.7 46.324,69.7 49.1,66.924 49.1,65.524 50.944,63.681 57.343,63.681 58.624,62.4 62.224,62.4 64.4,60.224 64.4,58.924 68.224,55.1 73.2,55.1 73.6,55.5 76.324,55.5 78.524,53.3 79.7,53.3 80.6,52.4 80.6,48.3 81.4,47.5 81.4,46.4 89.3,38.5 90.2,38.5 92.4,36.3 92.4,32.3 93.4,31.3 99.3,31.3 104.3,26.3 108,26.3 109.15,25.15 v1(109.15,24.75)
CAP0.CAP_SEL1.SEL2: IC16G.9 IC47.28 | length 122.2
  L1 w0.1: v1(32.825,79.425) IC16G.9@32.825,80.75 ; v1(97.75,20.25) IC47.28@97.75,21.55
  L3 w0.1: v1(32.825,79.425) 31.3,77.9 27.5,77.9 27,77.4 27,49.2 29,47.2 61.041,47.2 67.441,40.8 70.6,40.8 75.7,35.7 78.3,35.7 79.734,34.266 79.734,33.066 85.4,27.4 88.2,27.4 92.3,23.3 96.8,23.3 97.1,23 97.1,21.8 97.75,21.15 v1(97.75,20.25)
CAP0.CAP_SEL1.SEL3: IC16G.8 IC47.23 | length 131.5
  L1 w0.1: IC16G.8@32.825,86.65 v1(32.825,87.975) ; v1(95.25,20.75) IC47.23@95.25,21.55
  L3 w0.1: v1(32.825,87.975) 32.825,87.125 31.3,85.6 25.5,85.6 23.5,83.6 23.5,59.776 24.4,58.876 24.4,49.8 28.5,45.7 60.4,45.7 62.7,43.4 62.7,42.2 65.1,39.8 66,39.8 66.5,39.3 69,39.3 69.6,38.7 70.1,38.7 75.9,32.9 77.5,32.9 78.3,32.1 78.7,32.1 84.9,25.9 87.7,25.9 92.5,21.1 94.9,21.1 v1(95.25,20.75)
CAP0.CAP_SEL2.SEL0: IC17G.1 IC47.21 | length 130